# Allegro board LAYOUT.brd
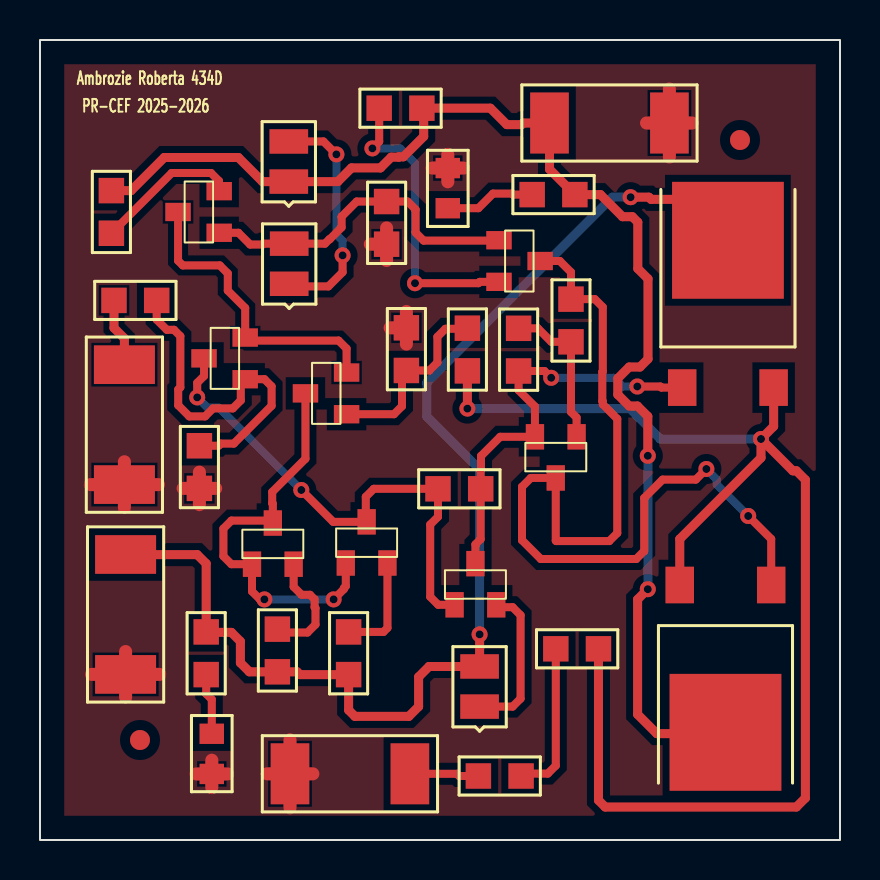
[diagram p0: board, top side]
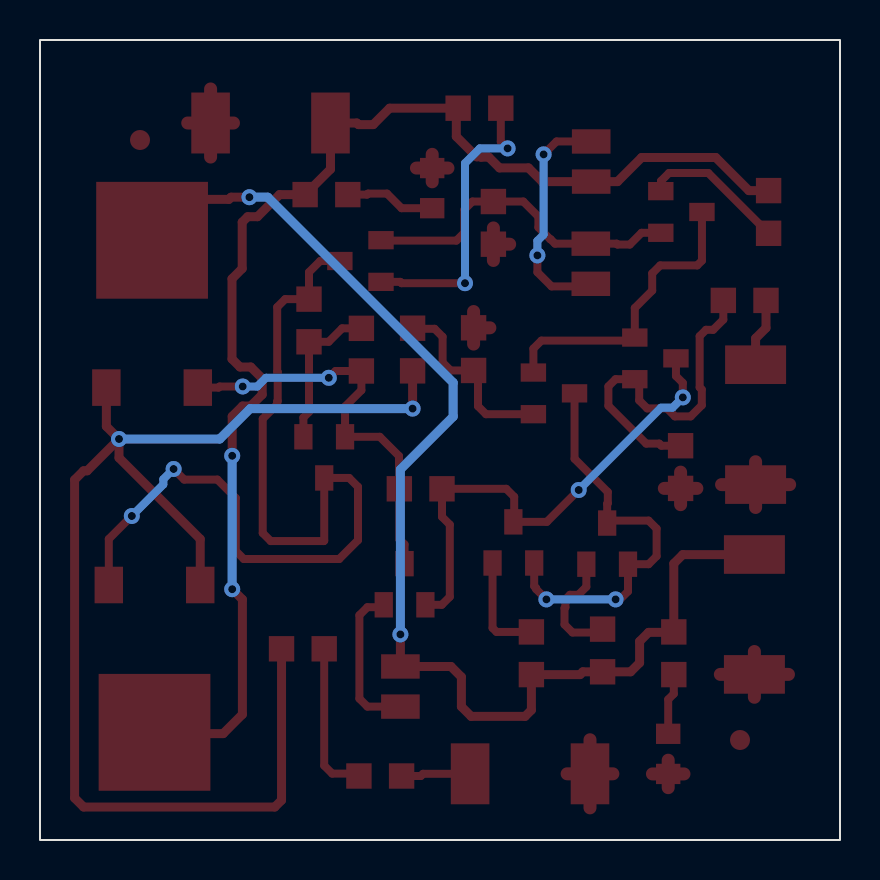
[diagram p1: board, bottom side, seen from below]

Outline 40 x 40 mm; copper layers: TOP, BOTTOM. Coordinates in mm from the lower left corner of the outline.
Outline path: rectangle 0,0 40,40

## Design rules (mm)
nets with their own width: min track width 0.4; nets N26078 N26084 N26170 N26266 N26292 N26366 N26392 N26544 N26604 N26638 N26642 N26968 N27050 N27144 N27222 N29477 N34708 N42690 N43012
nets with their own width: min track width 0.45; nets IN OUT VCC VEE
nets with their own width: min track width 0.65; nets GND

## Placement (name value [footprint] x y rotation side)
C1  470p  [SMC0805]  19.9 17.56 0 top
D1  LED  [SML0805]  8.59 5.31 270 top
D2  LED  [SML0805]  20.39 31.59 90 top
J1  CON2  [SMR2512]  4.22 17.77 90 top
J2  CON2  [SMR2512]  4.28 8.28 90 top
J3  CON2  [SMR2512]  12.5 3.31 0 top
J4  CON2  [SMR2512]  31.47 35.85 180 top
NOREF  -  []  0 40 0 top
NOREF#2  -  [unnamed#2]  35 35 0 top
NOREF#3  -  [unnamed#2]  5 5 0 top
NOREF#4  -  []  0 0 90 top
Q1  QBC856B  [TO236AA]  10.26 23.04 0 top
Q2  QBC856B  [TO236AA]  15.33 21.29 0 top
Q3  QBC846B  [TO236AA]  15.29 13.85 270 top
Q4  QBC846B  [TO236AA]  10.6 13.79 270 top
Q5  QBC856B  [TO236AA]  8.96 30.36 0 top
Q6  QBC846B  [TO236AA]  20.73 11.76 270 top
Q7  QBC856B  [TO236AA]  22.95 29.99 180 top
Q8  QMJD31C  [SMDPAK]  36.56 12.75 180 top
Q9  QMJD32CT4G  [SMDPAK]  32.11 22.62 0 top
Q10  QBC846B  [TO236AA]  26.83 20.16 90 top
R2  330  [SMR0805]  16.96 36.59 0 top
R4  510  [SMR0805]  26.55 24.91 90 top
R5  330  [SMR0805]  3.57 32.47 270 top
R6  9.1k  [SMR0805]  21.37 25.59 270 top
R7  1k  [SMR0805]  18.32 25.61 270 top
R8  510  [SMR0805]  23.93 23.45 90 top
R9  82  [SMR0805]  15.43 8.27 90 top
R10  82  [SMR0805]  11.87 8.41 90 top
R11  470  [SMR0805]  3.7 26.98 0 top
R12  330k  [SMR0805]  7.97 17.58 90 top
R13  15k  [SMR0805]  17.33 29.79 90 top
R14  1k  [SMR0805]  8.31 8.27 90 top
R15  1k  [SMR0805]  24.61 32.27 0 top
RS1  10  [SMR0805]  25.79 9.56 0 top
RS2  10  [SMR0805]  21.92 3.2 0 top
U1  1N4148  [SMD080512]  12.44 32.92 90 top
U2  1N4148  [SMD080512]  12.46 27.81 90 top
U3  1N4148  [SMD080512]  21.98 6.67 90 top

## Library data of the parts
C1 = C
D1 D2 = LED
J1-J4 = CON2
Q1 = QBC856B_6
Q2 = QBC856B_4
Q3 = QBC846B_0
Q4 = QBC846B_1
Q5 = QBC856B_2
Q6 = QBC846B_3
Q7 = QBC856B_5
Q8 = QMJD31C_2
Q9 = QMJD32CT4G_2
Q10 = QBC846B_4
R2 R4-R15 RS1 RS2 = R
U1-U3 = 1N4148_0

## Footprints (pads in the part's own frame, mm; a bottom-side part is the same pattern mirrored in y, then rotated)
SMC0805
  rect 1.27x1.27 smd: 1(0,0) 2(2.134,0)
SMD080512
  rect 1.219x1.93 smd: 1(0,0) 2(2.007,0)
SMDPAK
  rect 1.422x1.829 smd: 1(0,0) 3(4.572,0)
  rect 5.588x5.842 smd: 4(2.286,7.366)
SML0805
  rect 1.016x1.219 smd: 1(0,0) 2(2.007,0)
SMR0805
  rect 1.27x1.27 smd: 1(0,0) 2(2.134,0)
SMR2512
  rect 1.93x3.048 smd: 1(0,0) 2(5.994,0)
TO236AA
  rect 1.27x0.914 smd: 1(0,0) 2(0,2.083) 3(-2.057,1.041)
unnamed#2
  round 1 smd: (0,0)

## Nets
GND: D1.2(ANODE) D2.2(ANODE) J1.1 J2.1 J3.1 J4.1 R7.1 R12.1 R13.1
VCC: J4.2 Q8.4(C) R2.2 R5.1 R15.2 U1.1
VEE: J2.2 Q9.4(C) R9.1 R10.1 R14.2 U3.2
IN: J1.2 R11.1
OUT: Q8.3(E) Q9.3(E) R6.2 RS1.2
N26078: Q1.2(E) Q2.2(E) Q5.3(C)
N26084: C1.1 Q1.3(C) Q3.3(C) Q6.1(B)
N26170: Q2.3(C) Q3.1(B) Q4.1(B) Q4.3(C)
N26266: Q4.2(E) R10.2
N26292: Q3.2(E) R9.2
N26366: Q5.2(E) R5.2
N26392: Q5.1(B) Q7.1(B) R13.2 U2.2
N26544: Q2.1(B) R6.1 R7.2
N26604: C1.2 Q6.3(C) Q9.1(B) Q10.2(E) R8.1
N26638: Q7.3(C) Q8.1(B) Q10.3(C) R4.2
N26642: Q10.1(B) R4.1 R8.2
N26968: D2.1(CATHODE) R15.1
N27050: D1.1(CATHODE) R14.1
N27144: Q7.2(E) R2.1
N27222: RS1.1 RS2.2
N29477: Q1.1(B) R11.2 R12.2
N34708: J3.2 RS2.1
N42690: U1.2 U2.1
N43012: Q6.2(E) U3.1

## Via types
v1: diameter 0.8, hole 0.4, TOP to BOTTOM, 18 vias

## Routing (per net, layer and track width the routed paths; a pad name or vN(x,y) marks a point on that pad's centre or on a via; arc(x,y) is an arc through that point)
GND: length 36.8
  TOP w0.65: 2.58,8.28 J2.1 ; J2.1 4.28,9.42 ; J2.1 4.28,7.14 ; J2.1 5.98,8.28 ; D2.2 20.39,34.28 ; D2.2 21.18,33.6 ; D2.2 19.6,33.6 ; D2.2 20.39,32.91 ; 30.33,35.85 J4.1 ; J4.1 31.47,34.15 ; J4.1 32.61,35.85 ; J4.1 31.47,37.55 ; 16.52,29.79 R13.1 ; R13.1 17.33,28.98 ; R13.1 17.33,30.6 ; D1.2 9.38,3.3 ; D1.2 8.59,3.99 ; D1.2 8.59,2.62 ; D1.2 7.8,3.3 ; 17.51,25.61 R7.1 ; R7.1 18.32,24.8 ; R7.1 18.32,26.42 ; 2.52,17.77 J1.1 ; J1.1 4.22,16.63 ; J1.1 5.92,17.77 ; J1.1 4.22,18.91 ; 11.36,3.31 J3.1 ; J3.1 12.5,1.61 ; J3.1 12.5,5.01 ; J3.1 13.64,3.31 ; R12.1 7.97,18.39 ; R12.1 8.78,17.58 ; R12.1 7.16,17.58 ; R12.1 7.97,16.77
VCC: length 65.4
  TOP w0.45: v1(30.39,19.21) 30.39,21.18 29.87,21.7 29.46,21.7 28.89,22.27 28.89,23.08 29.46,23.65 30,23.65 30.4,24.05 30.4,28.06 29.89,28.57 29.89,30.89 29.61,31.16 29.13,31.16 28.02,32.27 R15.2 25.48,33.54 J4.2 24.16,35.85 24.08,35.77 23.34,35.77 22.52,36.59 R2.2 19.18,36.5 19.18,35.17 18.17,34.16 17.95,34.16 17.93,34.14 17.56,34.14 17.02,33.6 15.57,33.6 14.89,32.92 U1.1 11.12,32.92 9.92,34.12 6.21,34.12 4.56,32.47 R5.1 ; Q8.4 34.21,5.32 30.84,5.32 29.88,6.28 29.88,12.03 v1(30.39,12.54)
  BOTTOM w0.45: v1(30.39,19.21) v1(30.39,12.54)
VEE: length 61.7
  TOP w0.45: v1(29.53,32.14) 30.45,32.14 30.56,32.03 32.35,32.03 Q9.4 ; J2.2 4.28,14.27 7.86,14.27 8.31,13.82 R14.2 8.33,10.38 9.57,10.38 10.02,9.93 10.02,8.86 10.47,8.41 R10.1 12.86,8.41 13,8.27 R9.1 15.43,6.5 15.75,6.18 18.44,6.18 18.93,6.67 18.93,8.15 19.45,8.68 U3.2 v1(21.98,10.28)
  BOTTOM w0.45: v1(21.98,10.28) 21.98,18.53 19.34,21.17 19.34,22.87 28.61,32.14 v1(29.53,32.14)
IN: length 3.4
  TOP w0.45: R11.1 3.7,25.6 4.22,25.08 J1.2
OUT: length 66.2
  TOP w0.45: v1(36.05,20.05) 36.05,19.11 31.99,15.05 Q8.3 ; v1(36.05,20.05) 37.64,18.46 37.82,18.46 38.27,18.01 38.27,2.1 37.82,1.65 28.26,1.65 27.92,1.99 RS1.2 ; v1(36.05,20.05) 36.68,20.68 Q9.3 ; R6.2 v1(21.37,21.57)
  BOTTOM w0.45: v1(36.05,20.05) 31.01,20.05 29.49,21.57 v1(21.37,21.57)
N26078: length 15.2
  TOP w0.4: Q2.2 15.33,24.57 14.93,24.97 10.41,24.97 Q1.2 10.26,26.6 9.39,27.47 9.39,28.33 8.99,28.73 7.14,28.73 6.9,28.97 Q5.3
N26084: length 25.1
  TOP w0.4: v1(13.07,17.5) 14.66,15.91 Q3.3 16.29,15.95 16.29,17.16 16.69,17.56 C1.1 19.9,16.16 19.51,15.77 19.51,12.16 19.91,11.76 Q6.1 ; Q1.3 8.2,23.2 7.86,22.86 v1(7.86,22.13)
  BOTTOM w0.4: v1(7.86,22.13) 8.37,21.62 8.95,21.62 v1(13.07,17.5)
N26170: length 20.5
  TOP w0.4: Q2.3 13.27,19.06 11.61,17.4 11.61,16.84 11.64,16.81 Q4.3 11.52,15.97 9.57,15.97 9.17,15.57 9.17,14.19 9.57,13.79 Q4.1 10.6,12.43 11,12.03 v1(11.22,12.03) ; Q3.1 15.29,12.69 15.19,12.59 15.19,12.54 v1(14.68,12.03)
  BOTTOM w0.4: v1(11.22,12.03) v1(14.68,12.03)
N26266: length 5.9
  TOP w0.4: R10.2 12.04,10.37 13.38,10.37 13.78,10.77 13.78,11.59 13.73,11.64 13.73,12.03 13.5,12.26 13.08,12.26 12.68,12.66 Q4.2
N26292: length 5.3
  TOP w0.4: Q3.2 17.37,10.6 17.17,10.4 R9.2
N26366: length 7.3
  TOP w0.4: R5.2 6.58,33.35 8.55,33.35 8.95,32.95 8.95,32.45 Q5.2
N26392: length 16.9
  TOP w0.4: Q7.1 22.93,29.97 19.18,29.97 18.78,30.37 18.78,31.52 18.38,31.92 R13.2 15.83,31.92 15.08,31.17 15.08,30.63 14.48,30.03 14.47,30.03 14.25,29.82 U2.2 11.17,29.82 11.12,29.77 10.51,29.77 9.92,30.36 Q5.1
N26544: length 9.5
  TOP w0.4: R6.1 21.34,25.56 20.27,25.56 19.87,25.16 19.87,23.88 19.47,23.48 R7.2 18.1,23.26 18.1,21.69 17.7,21.29 Q2.1
N26604: length 20.7
  TOP w0.4: Q9.1 31.07,22.62 31.02,22.68 v1(29.86,22.68) ; v1(25.56,23.11) 25.22,23.45 R8.1 23.93,22.49 24.75,21.67 Q10.2 23.01,20.16 22.05,19.2 22.05,18.54 22.03,18.52 C1.2 22.03,15.04 21.77,14.78 Q6.3
  BOTTOM w0.4: v1(29.86,22.68) 29.14,22.68 28.7,23.11 v1(25.56,23.11)
N26638: length 47.6
  TOP w0.4: Q8.1 36.56,15.05 v1(35.41,16.2) ; Q7.3 25.99,28.95 26.55,28.39 R4.2 27.74,27.04 28.14,26.64 28.14,23.43 28.11,23.4 28.11,21.95 28.14,21.93 28.14,21.78 28.86,21.06 28.86,15.35 28.46,14.95 25.81,14.95 25.79,14.97 Q10.3 24.54,18.1 24.1,17.66 24.1,14.99 25.04,14.05 29.81,14.05 30.21,14.45 30.21,17.1 31.13,18.02 32.79,18.02 v1(33.32,18.55)
  BOTTOM w0.4: v1(33.32,18.55) 33.83,18.04 33.83,17.78 v1(35.41,16.2)
N26642: length 7.8
  TOP w0.4: Q10.1 26.83,21.12 26.55,21.4 R4.1 25.57,24.91 24.89,25.58 R8.2
N26968: length 4.5
  TOP w0.4: R15.1 23.65,32.27 23.6,32.32 22.65,32.32 21.92,31.59 D2.1
N27050: length 3.1
  TOP w0.4: R14.1 8.31,7.31 8.59,7.03 D1.1
N27144: length 14.8
  TOP w0.4: v1(16.62,34.58) 16.96,34.92 R2.1 ; v1(18.75,27.84) 21.92,27.84 21.99,27.91 Q7.2
  BOTTOM w0.4: v1(16.62,34.58) 18.01,34.58 18.75,33.84 v1(18.75,27.84)
N27222: length 7.8
  TOP w0.4: RS1.1 25.79,3.72 25.39,3.32 24.17,3.32 RS2.2
N29477: length 17.7
  TOP w0.4: R11.2 5.83,26.02 6.34,25.51 6.7,25.51 7.02,25.19 7.02,22.63 6.91,22.52 6.91,21.74 7.47,21.18 8.25,21.18 8.65,21.58 9.64,21.58 10.04,21.98 10.04,22.82 Q1.1 11.22,23.04 11.58,22.68 11.58,21.71 9.69,19.82 9.04,19.82 8.93,19.71 R12.2
N34708: length 3.5
  TOP w0.4: RS2.1 20.96,3.2 20.85,3.31 J3.2
N42690: length 11.7
  TOP w0.4: U1.2 14.17,34.93 v1(14.82,34.28) ; U2.1 12.59,27.68 14.42,27.68 15.13,28.39 v1(15.13,29.23)
  BOTTOM w0.4: v1(14.82,34.28) 14.82,30.27 15.13,29.96 v1(15.13,29.23)
N43012: length 7.8
  TOP w0.4: U3.1 23.63,6.67 24.03,7.07 24.03,11.24 23.63,11.64 22.93,11.64 Q6.2

## Copper pours and planes (outline as drawn; the poured copper is in the pictures)
GND on TOP: 1.21,38.79 1.21,1.21 38.79,1.21 38.79,38.79 ; 15 cut-outs

## Text on the board
Ref Des/Silkscreen Top: Ambrozie Roberta 434D | PR-CEF 2025-2026
XSECTION_CHART: *  SURFACE - AIR 0 MM | L1: TOP CONDUCTOR - COPPER 0.018 MM | *  DIELECTRIC - FR-4 1.564 MM | L2: BOTTOM CONDUCTOR - COPPER 0.018 MM | DESIGN CROSS SECTION CHART | ___________________________ | TOTAL THICKNESS 1.6 MM | 1-2 | FIGURE | SIZE | 0.4 | DRILL CHART: TOP to BOTTOM | ALL UNITS ARE IN MILLIMETERS | PLATED | QTY | 18
